# Allegro board PressureSensorV1.brd
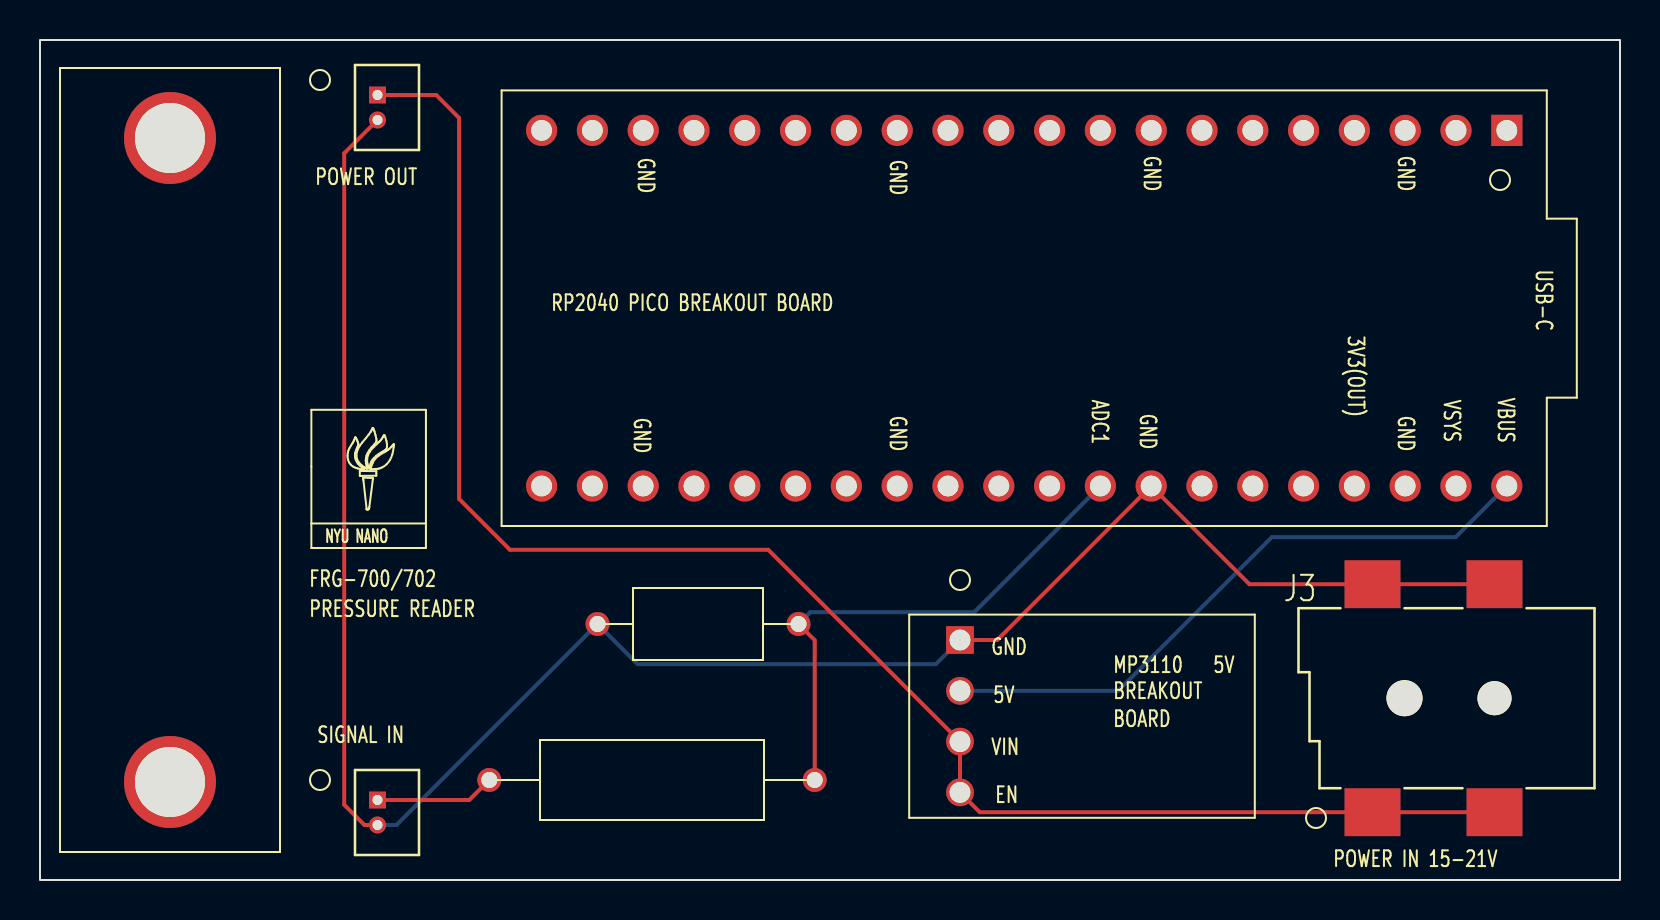
[diagram p0: board, top side]
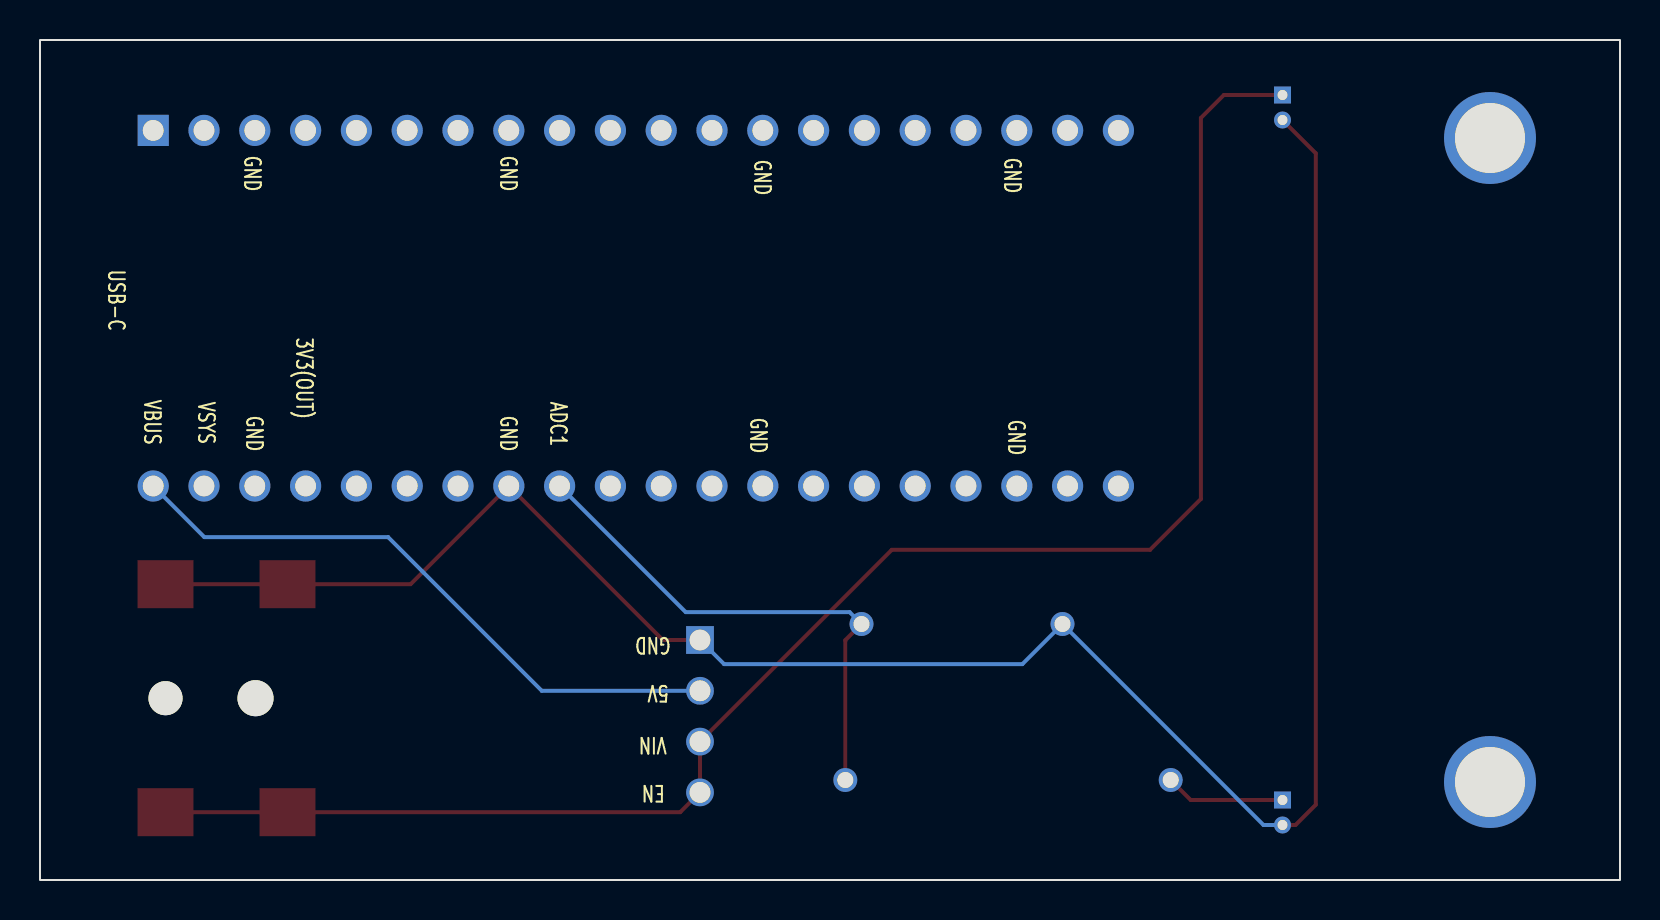
[diagram p1: board, bottom side, seen from below]

Outline 79 x 42 mm; copper layers: TOP, BOTTOM. Coordinates in mm from the lower left corner of the outline.
Outline path: rectangle 0,0 79,42

## Design rules (mm)
constraint set DEFAULT: 

## Placement (name value [footprint] x y rotation side)
J1  Connec2  [MOLEX_53047-0210]  16.88 38.62 270 top
J2  Connec2  [MOLEX_53047-0210]  16.88 3.38 270 top
J3  PJ-002AH-SMT-TR  [CUI_PJ-002AH-SMT-TR]  69.62 9.39 180 top
NOREF  -  [unnamed]  6.5 37.1 0 top
NOREF#2  -  [#2]  13.5 15.2 0 top
NOREF#3  -  [#2]  -63.4 -105.5 0 top
NOREF#4  -  [#2]  0 0 90 top
NOREF#5  -  [unnamed]  6.5 4.9 0 top
NOREF#6  -  [#2]  0 42 0 top
R1  120k  [RESRN60]  30.6 5 180 top
R2  55k  [RESRN50]  32.9 12.8 0 top
U1  RP2040 0.96 LCD Breakout Board  [RP2040BREAKOUTBOARD]  73.34 37.48 180 top
U2  MPM3610 5V Buck Converter Breakout Board  [MPM3610BREAKOUTBOARD]  46 12 270 top

## Library data of the parts
J1 J2 = Connec2
J3 = PowerJack_PJ-002AH-SMT-TR
R1 R2 = R
U1 = RP2040_0p96LCD_BreakoutBoard
U2 = MPM3610_BreakoutBoard

## Footprints (pads in the part's own frame, mm; a bottom-side part is the same pattern mirrored in y, then rotated)
CUI_PJ-002AH-SMT-TR
  round 1.7 hole 1.7 unplated: (-3.1,0.3)
  round 1.8 hole 1.8 unplated: (1.4,0.3)
  rect 2.8x2.4 smd: 1A(3,6) 1B(-3.1,6) 2(-3.1,-5.4) 3(3,-5.4)
MOLEX_53047-0210
  round 0.85 hole 0.5: 1(0.625,0)
  rect 0.85x0.85 hole 0.5: 2(-0.625,0)
MPM3610BREAKOUTBOARD
  rect 1.39x1.39 hole 1.04: 1(0,0)
  round 1.39 hole 1.04: 2(2.54,0) 3(5.08,0) 4(7.62,0)
RESRN50
  round 1.2 hole 0.8: 1(-5.025,0) 2(5.025,0)
RESRN60
  round 1.2 hole 0.8: 1(-8.135,0) 2(8.135,0)
RP2040BREAKOUTBOARD
  rect 1.56x1.56 hole 1.04: 1(0,0)
  round 1.56 hole 1.04: 2(2.54,0) 3(5.08,0) 4(7.62,0) 5(10.16,0) 6(12.7,0) 7(15.24,0) 8(17.78,0) 9(20.32,0) 10(22.86,0) 11(25.4,0) 12(27.94,0) 13(30.48,0) 14(33.02,0) 15(35.56,0) 16(38.1,0) 17(40.64,0) 18(43.18,0) 19(45.72,0) 20(48.26,0) 21(48.26,17.78) 22(45.72,17.78) 23(43.18,17.78) 24(40.64,17.78) 25(38.1,17.78) 26(35.56,17.78) 27(33.02,17.78) 28(30.48,17.78) 29(27.94,17.78) 30(25.4,17.78) 31(22.86,17.78) 32(20.32,17.78) 33(17.78,17.78) 34(15.24,17.78) 35(12.7,17.78) 36(10.16,17.78) 37(7.62,17.78) 38(5.08,17.78) 39(2.54,17.78) 40(0,17.78)
unnamed
  round 4.6 hole 3.5: (0,0)

## Nets
5V: U1.40 U2.2
POWER: J1.2 J3.1A J3.1B U2.3(VIN) U2.4
POWER_GND: J1.1 J2.1 J3.2 J3.3 R2.1 U1.33 U2.1
SCALED_VOLTAGE: R1.1 R2.2 U1.32
SIGNAL: J2.2 R1.2

Pads without a net: U1 1 2 3 4 5 6 7 8 9 10 11 12 13 14 15 16 17 18 19 20 21 22 23 24 25 26 27 28 29 30 31 34 35 36 37 38 39

## Routing (per net, layer and track width the routed paths; a pad name or vN(x,y) marks a point on that pad's centre or on a via; arc(x,y) is an arc through that point)
5V: length 31.6
  BOTTOM w0.2: U2.2 53.91,9.46 61.59,17.14 70.78,17.14 U1.40
POWER: length 83.4
  TOP w0.2: J1.2 19.8,39.25 20.95,38.1 20.95,19.05 23.5,16.51 36.41,16.51 U2.3 U2.4 46.99,3.39 J3.1A J3.1B
POWER_GND: length 103.6
  TOP w0.2: J3.2 J3.3 60.47,14.79 U1.33 47.86,12 U2.1 ; J1.1 15.21,36.34 15.21,3.76 16.22,2.75 J2.1
  BOTTOM w0.2: J2.1 17.82,2.75 R2.1 29.88,10.79 44.8,10.79 U2.1
SCALED_VOLTAGE: length 26.1
  TOP w0.2: R1.1 38.73,11.99 R2.2
  BOTTOM w0.2: R2.2 38.52,13.39 46.72,13.39 U1.32
SIGNAL: length 6
  TOP w0.2: 22.46,5 21.46,4 J2.2

## Text on the board
Ref Des/Silkscreen Top: NYU NANO | FRG-700/702 | PRESSURE READER | POWER OUT | SIGNAL IN | RP2040 PICO BREAKOUT BOARD | MP3110 | BREAKOUT | BOARD | 5V | POWER IN 15-21V
XSECTION_CHART: *  SURFACE | L1 TOP CONDUCTOR | *  DIELECTRIC | L2 BOTTOM CONDUCTOR | DESIGN CROSS SECTION CHART | ___________________________ | TOTAL THICKNESS 1.67 MM | 1-2
PAGE_OUTLINE: PRESSURE READER | FRG-700/702 | FIGURE | FINISHED_SIZE | 0.5 | 0.8 | 1.04 | 1.7 | 1.8 | DRILL CHART: TOP to BOTTOM | ALL UNITS ARE IN MILLIMETERS | DRILLED_SIZE | - | PLATED | NON-PLATED | QTY | 4 | 44 | 1
